# Altium PCB BQ24072-BREAKOUT.PcbDoc
Units mm, origin at the board's own origin, x right, y up, seen from the top; angles counter-clockwise.
Board outline 20.38 x 20.38 mm, 2 copper layers (Top Layer, Bottom Layer), stack 1.57 mm thick; 14 components, 17 nets, 69 pads, 30 vias.
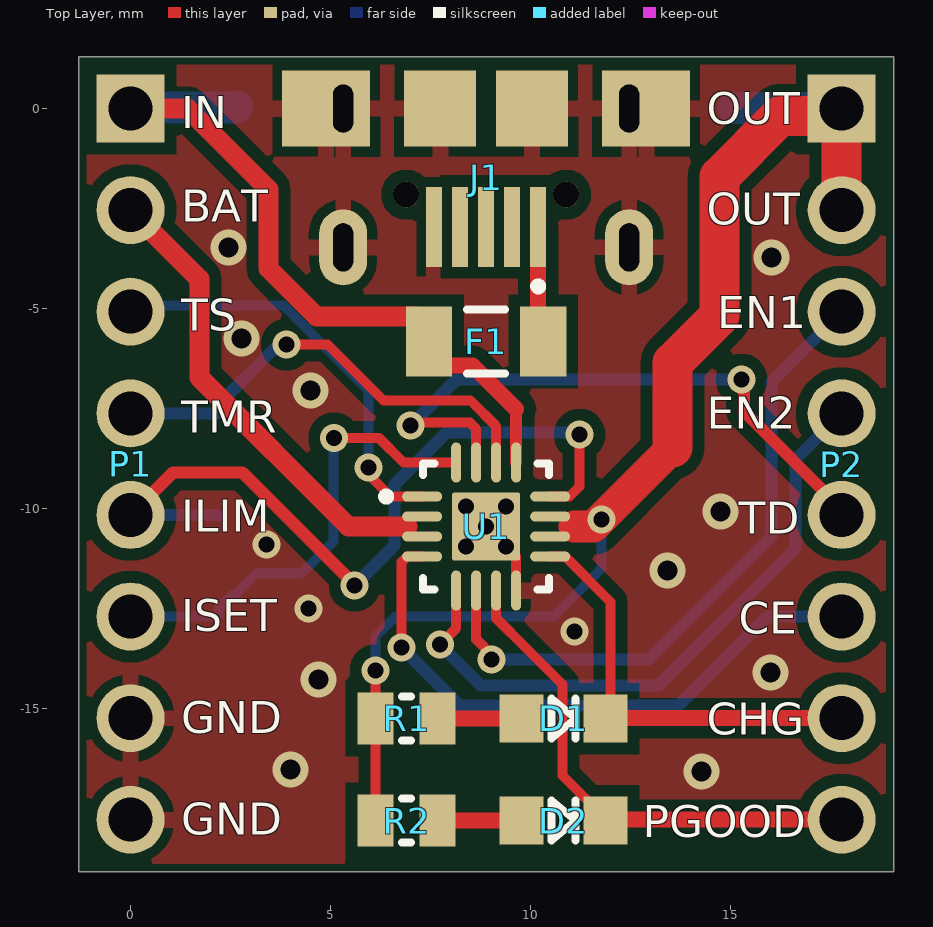
[diagram p0: Top Layer view]
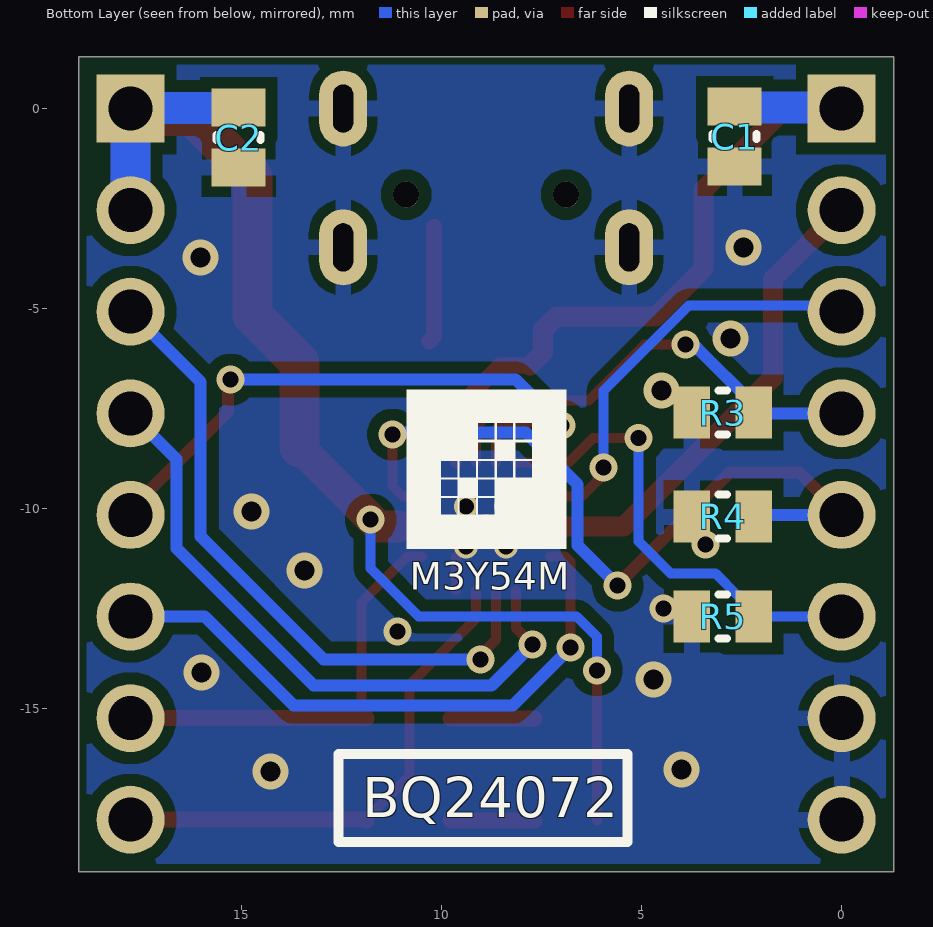
[diagram p1: Bottom Layer view, seen from below]
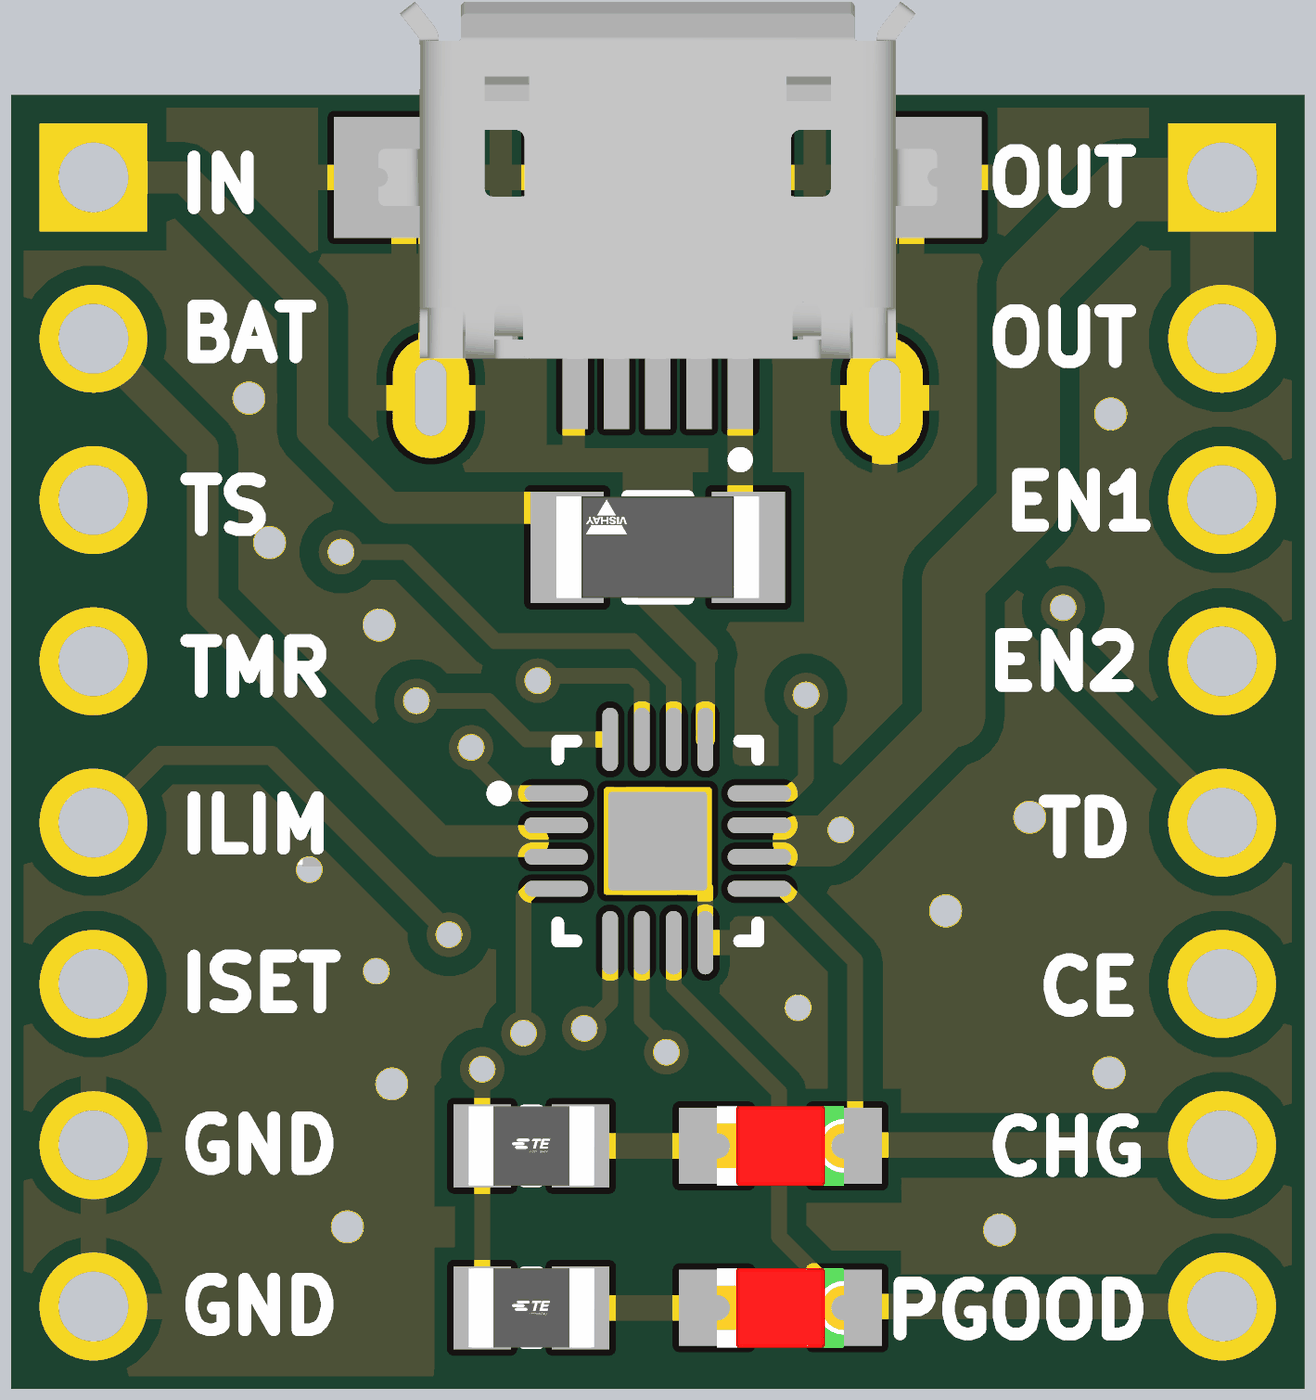
[diagram p2: 3D render of the assembled board from above, using the file's embedded part models]
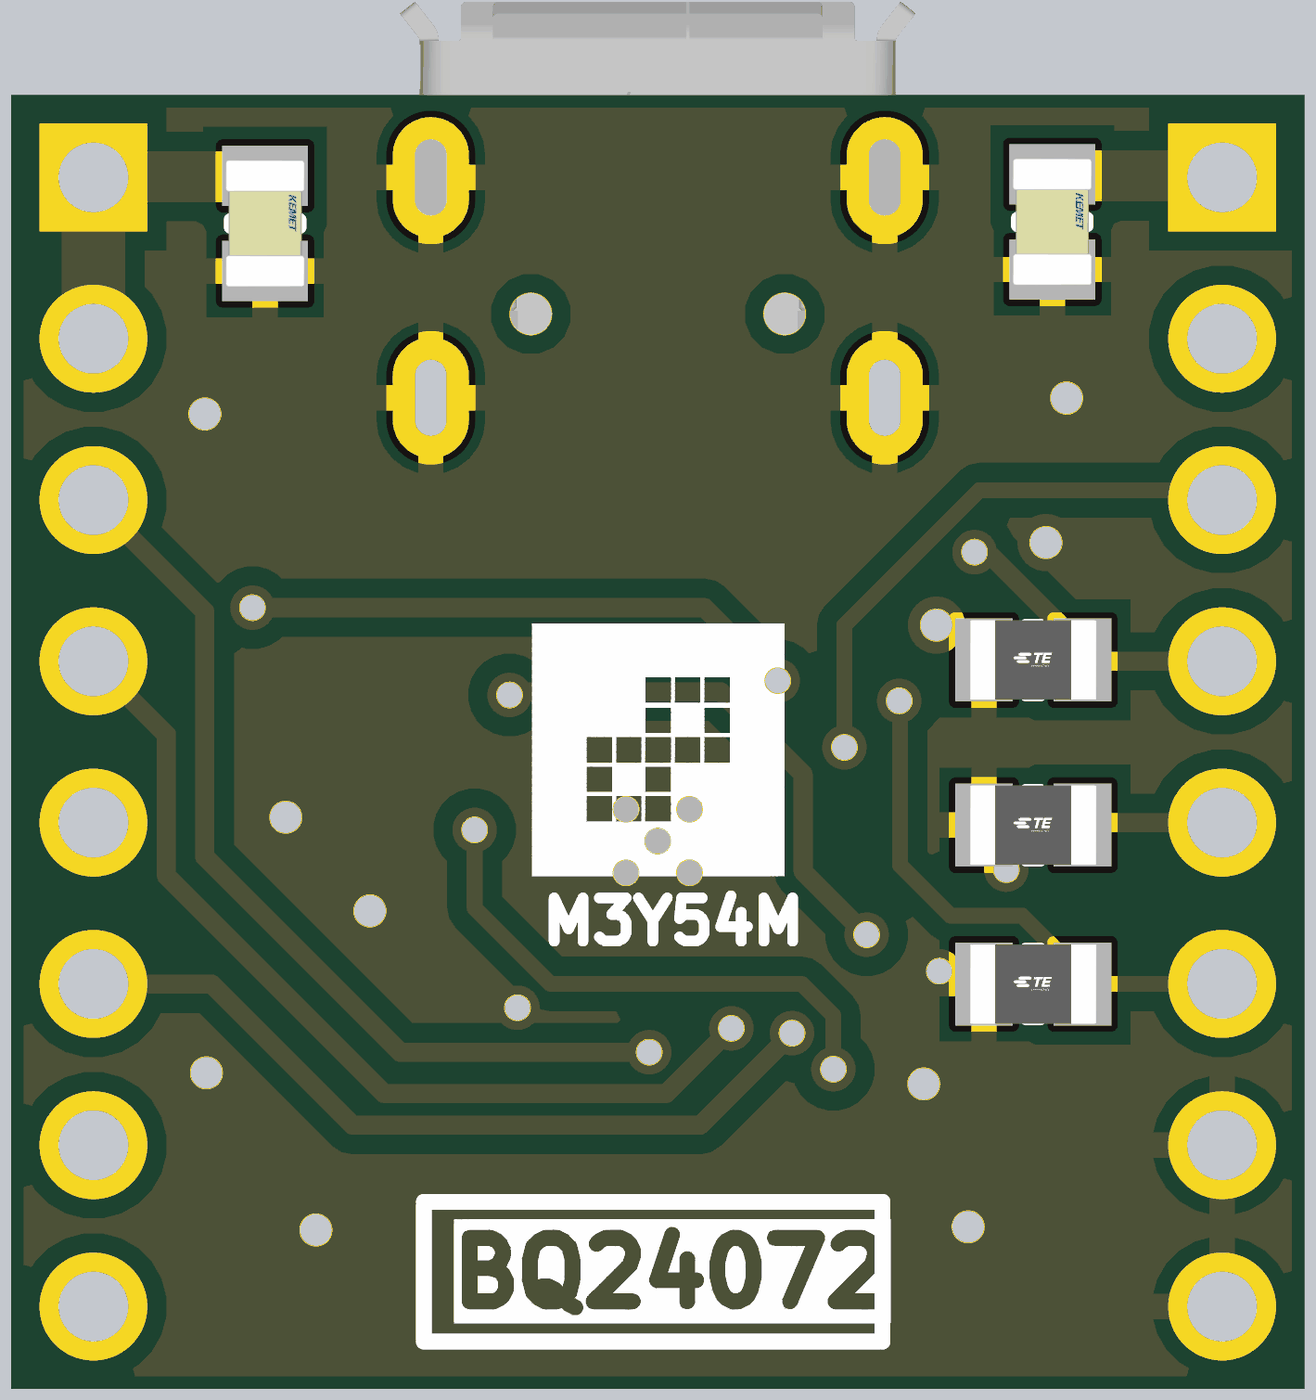
[diagram p3: 3D render of the assembled board from below, using the file's embedded part models]

## Layer stack, top to bottom
Top Solder: solder mask 0.015, Solder Resist, Dk 3.5
Top Layer: signal copper 0.035
Dielectric 1: dielectric 1.5, FR-4, Dk 4.2
Bottom Layer: signal copper 0.035
Bottom Solder: solder mask 0.015, Solder Resist, Dk 3.5

## Board outline
-1.3,-19.08 19.08,-19.08 19.08,1.3 -1.3,1.3

## Design rules (kind name [scope] priority, off if disabled: settings)
BoardOutlineClearance [All] p1: gap=0.2 ignorepadtopadclearanceinfootprint=FALSE
Clearance Clearance_Polygon_Fiducials [All vs InComponent('FID?')] p1: gap=1.3 ignorepadtopadclearanceinfootprint=FALSE
Clearance Clearance_Polygon [InPolygon] p2: gap=0.3 ignorepadtopadclearanceinfootprint=FALSE
Clearance [All] p3: gap=0.15 ignorepadtopadclearanceinfootprint=FALSE except(0: Arc-Hole Track-Hole SMDPad-Hole THPad-Hole Via-Hole Fill-Hole Poly-Hole Region-Hole Text-Hole)
HoleSize [All] p1: absolutevalues=TRUE maxlimit=3.5 minlimit=0.3 maxpercent=80.000 minpercent=20.000
MinimumSolderMaskSliver [All] p1: minsoldermaskwidth=0.15
PolygonConnect PolygonConnect_Via [IsVia] p1: connectstyle=Direct reliefconductorwidth=0.4 reliefentries=4 polygonreliefangle="90 Angle" airgapwidth=0.25
PolygonConnect [All] p2: connectstyle=Relief reliefconductorwidth=0.4 reliefentries=4 polygonreliefangle="90 Angle" airgapwidth=0.25
RoutingVias [All] p1: holewidth=0.4 width=0.7 viastyle="Through Hole" minholewidth=0.4 minwidth=0.6 maxholewidth=2 maxwidth=3
SilkToSilkClearance [All] p1: silktosilkclearance=0.15
SilkToSolderMaskClearance [IsPad] p1: minsilkscreentomaskgap=0.1 clearancetoexposedcopper=TRUE
SolderMaskExpansion SolderMaskExpansion_Via [IsVia] p1: expansion=0.102 istentingtop=TRUE soldermaskfromhole=TRUE
SolderMaskExpansion [All] p2: expansion=0.102 istentingtop=FALSE
Width [All] p1: maxlimit=2 minlimit=0.25 preferedwidth=0.3
26 further rules are at their usual default settings.

## Components (designator, comment, footprint, x,y, rotation, side; value= is the part's Value field where it differs from the comment)
C1 "C0805C104K5RAC7411" C0805 2.675,-0.7 r270 bottom value=1uF_50V
C2 "C0805C104K5RAC7411" C0805 15.075,-0.725 r270 bottom value=4.7uF_50V
D1 "RED" LED0805 10.825,-15.25 r180 top
D2 "BLUE" LED0805 10.825,-17.8 r180 top
F1 "NANOSMDC150F" R1206 8.89,-5.825 r180 top value=1.5A_6V_PTC
J1 "629105150921" CON-MICRO-USB-B-SMD-WITH-HOLDER 8.89,0 r180 top
P1 "CON-HDR-1X8" CON-HDR-1X8-2.54 0,0 r270 top
P2 "CON-HDR-1X8" CON-HDR-1X8-2.54 17.78,0 r270 top
R1 "CRG0805F10K" R0805 6.9,-15.25 r0 top value=2.2K
R2 "CRG0805F10K" R0805 6.9,-17.8 r0 top value=2.2K
R3 "CRG0805F10K" R0805 2.975,-7.6 r180 bottom value=46.4K
R4 "CRG0805F10K" R0805 2.975,-10.2 r180 bottom value=1.18K
R5 "CRG0805F10K" R0805 2.975,-12.7 r180 bottom value=1.13K
U1 "BQ24072TRGTT" VQFN-16 8.89,-10.45 r0 top

## Footprints (in the part's own frame and the unit in brackets; to place one, negate y for a bottom-side part, rotate by r counter-clockwise, add the part's x,y. Pads: shape width x height; smd on the part's side, far side on the other; paste and mask are expansions set on the pad)
C0805 [mm] "FP-C0805C-DN-MFG"
  rect 0.95x1.35 smd: 1(-0.75,0) 2(0.75,0)
  silkscreen extent -0.06,-0.55 0.06,0.55, body extent -1,-0.63 1,0.63, height 0.88
CON-HDR-1X8-2.54 [mm] "Connector; Header; 8 Position, 2.54 Pitch"
  rect 1.7x1.7 hole 1.1 paste-1000 mask+0: 1(0,0)
  round 1.7 hole 1.1 paste-1000 mask+0: 2(2.54,0) 3(5.08,0) 4(7.62,0) 5(10.16,0) 6(12.7,0) 7(15.24,0) 8(17.78,0)
CON-MICRO-USB-B-SMD-WITH-HOLDER [mm] "MICRO USB 5P female seat B type 7.2 four-pin board foot length 1.3 with column curling"
  rect 0.4x2 smd: 1(-1.3,2.96) 2(-0.65,2.96) 3(0,2.96) 4(0.65,2.96) 5(1.3,2.96)
  rect 2.2x1.9 smd: Shell(-4,0) Shell(4,0)
  oval 1.2x1.9 hole 0.5 slot 1.2 at 90 deg: Shell(-3.575,3.47) Shell(-3.575,0) Shell(3.575,3.47) Shell(3.575,0)
  rect 1.8x1.9 smd: Shell(-1.15,0) Shell(1.15,0)
  round 0.65 hole 0.65 paste+0 mask+0: ""(-2,2.15) ""(2,2.15)
  silkscreen extent -1.4,4.35 -1.2,4.54, body extent -4.4,-2.77 4.4,2.86, height 2.79
LED0805 [mm]
  rect 1.1x1.2 smd: 1(1.05,0) 2(-1.05,0)
  silkscreen extent -0.3,-0.5 0.3,0.5, body extent -1.7,-0.77 1.7,0.77, height 0.25
R0805 [mm] "FP-CRG0805-IPC_C"
  rect 0.906x1.307 smd: 1(-0.776,0) 2(0.776,0)
  silkscreen extent -0.11,-0.55 0.11,0.55, body extent -1.33,-0.8 1.33,0.8, height 0.25
R1206 [mm] "FP-CRCW1206-e3-IPC_B"
  rect 1.156x1.758 smd: 1(-1.426,0) 2(1.426,0)
  silkscreen extent -0.47,-0.8 0.47,0.8, body extent -2.25,-1.13 2.25,1.13, height 0.25
VQFN-16 [mm] "QFN, 16-Leads, Body 3x3mm, Pitch 0.5mm, Thermal Pad 1.65x1.65mm"
  oval 1x0.25 smd: 1(-1.6,0.75) 2(-1.6,0.25) 3(-1.6,-0.25) 4(-1.6,-0.75) 9(1.6,-0.75) 10(1.6,-0.25) 11(1.6,0.25) 12(1.6,0.75)
  oval 0.25x1 smd: 5(-0.75,-1.6) 6(-0.25,-1.6) 7(0.25,-1.6) 8(0.75,-1.6) 13(0.75,1.6) 14(0.25,1.6) 15(-0.25,1.6) 16(-0.75,1.6)
  rrect6% 1.55x1.55 on Top Paste: 17(0,0)
  rrect6% 1.7x1.7 smd paste-0.85: 17(0,0)
  silkscreen extent -2.6,-1.57 1.57,1.58, body extent -1.5,-1.5 1.5,1.5, height 1

## Part data
C1 C2: library part CAPACITOR, "C0805 0.10 μF X7R 30ppm/°C 10.00% 50 V", Capacitance=100nF, Manufacturer=KEMET, Package=C0805C-DN, Temperature="-55°C to +125°C", Temperature Characteristic=X7R, Temperature Coefficient=30ppm/°C, Temperature Range High=+125°C, Temperature Range Low=-55°C, Tolerance=0.1, Voltage Rating="50 V", Automotive=No, Category=Cap, ComponentLink2Description=Datasheet, ComponentLink2URL=https://content.kemet.com/datasheets/KEM_C1003_C0G_SMD.pdf, Device Class L1="Passive Components", Device Class L2=Capacitors, Device Class L3="Ceramic Capacitors", Height=0.88mm, Ipc Land Pattern Name=CAPC200125X78, Lead Free=Yes, Manufacturer Part Number=C0805C104K5RAC7411, Material=Ceramic, Octopart=https://octopart.com/c0805c104k5rac7411-kemet-18508045, RoHS=TRUE
D1 D2: library part LED, "Typical LED"
F1: library part FUSE-PTC, "FUSE PPTC 1.5A (1206) 6V RESETTABLE"
J1: library part CON-MICRO-USB-AB-RCPT-SMD, "Micro USB 2.0 Type AB Receptacle WR-COM, Horizontal, SMT", Contact Resistance=30mOhm, Manufacturer="Wurth Elektronik", Operating Temperature=-40to85degC, Rated Current=1.8A, Working Voltage=30VAC, Connector Type=MicroUSB2.0TypeAB, Datasheet URL=https://katalog.we-online.de/em/datasheet/629105150921.pdf, Gender=Receptacle, Manufacturer URL=http://www.we-online.de, Mounting Technology=SMT, Orientation=Horizontal, Package Reference=629105150921, Packaging=TapeandReel, Part Number=629105150921, Publisher=WurthElektronik
P1 P2: "Pin Header, 8-Pin", LatestRevisionDate=17-Jul-2002, LatestRevisionNote="Re-released for DXP Platform.", Publisher="Altium Limited"
R1 R2 R3 R4 R5: library part RESISTOR, "RES SMD 10K OHM 1% 1/8W 0805", Case/Package=0805, Max Operating Temperature=125°C, Min Operating Temperature=-55°C, Number of Resistors=1, Power Rating=125mW, Resistor Type="Thick Film", Temperature Coefficient=100ppm/°C, Tolerance=1%, Voltage Rating=150V, Depth=1.25mm, ELV=Compliant, Height=0.55mm, Length=2mm, Mount="Surface Mount", Number of Terminations=2, Packaging="Tape and Reel", Radiation Hardening=No, RoHS Compliant=Yes, Series="CRG Series", Technology="THICK FILM", Termination=Solder
U1: library part BQ24072, "1.5 A USB-Friendly Li-Ion Battery Charger and Power-Path Management IC, 4.3 V, -40 to 85 degC, 16-pin QFN (RGT), Green (RoHS & no Sb/Br)", Manufacturer="Texas Instruments", Over Voltage Protection=N, Code_JEDEC=MO-220, ComponentLink1Description=Datasheet, ComponentLink1URL=http://www.ti.com/general/docs/lit/getliterature.tsp?genericPartNumber=BQ24072T&fileType=pdf, DatasheetVersion=SLUS937A, Eco-Plan="Green (RoHS & no Sb/Br)", Lead Acid=N, Li-Ion=Y, Li-Polymer=Y, Mounting Technology="Surface Mount", NiCd=N, NiMH=N, PackageDescription="16-Pin Plastic Quad Flat No-Lead, 3 x 3 mm Body, 0.5 mm Pitch, 1.7 x 1.7 mm Exposed Pad", PackageReference=RGT0016C, PackageVersion="revH, Oct-2011", PartNumber=BQ24072TRGTT, SubFamily="Battery Charge Management", Vin(Min)(V)=4.3

## Via types
v1: diameter 0.7, hole 0.4, Top Layer to Bottom Layer, tented both sides, 15 vias
v2: diameter 0.9, hole 0.5, Top Layer to Bottom Layer, tented both sides, 10 vias
v3: diameter 0.6, hole 0.4, Top Layer to Bottom Layer, tented both sides, 5 vias

## Nets (pads, with @x,y where several pads share a name; then routed paths per layer and width w, separated by ;. In a path a pad name is that pad's centre, name@x,y a point inside that pad or via, vN(x,y) a via of type N, cw(c..) or ccw(c..) an arc to the next point about the centre after c; other vN are vias at no path point)
BAT: P1.2 U1.2 U1.3 | length 11.6
  Top Layer w0.5: P1.2 1.72,-4.26 1.72,-6.72 5.45,-10.45 6.925,-10.45
CE: P2.6 U1.4 | length 15.2
  Top Layer w0.25: v1(6.775,-13.475) 6.775,-11.34 6.915,-11.2 U1.4
  Bottom Layer w0.3: v1(6.775,-13.475) 8.225,-14.925 13.7,-14.925 15.925,-12.7 P2.6
CHG: D1.2 P2.7 U1.9 | length 10.7
  Top Layer w0.25: U1.9 10.865,-11.2 12,-12.335 D1.2@12,-15.125
  Top Layer w0.4: D1.2 11.885,-15.24 P2.7
EN1: P2.3 U1.6 | length 16.5
  Top Layer w0.25: U1.6 8.64,-13.268 9.025,-13.653 v1(9.025,-13.775)
  Bottom Layer w0.3: v1(9.025,-13.775) 12.95,-13.775 16.025,-10.7 16.025,-6.835 P2.3
EN2: P2.4 U1.5 | length 16.1
  Top Layer w0.25: v1(7.731,-13.399) 8.14,-12.99 U1.5
  Bottom Layer w0.3: v1(7.731,-13.399) 8.756,-14.425 13.2,-14.425 16.63,-10.995 16.63,-8.77 P2.4
GND: C1.2 C2.2 J1.5 J1.Shell P1.7 P1.8 R3.1 R4.1 R5.1 U1.8 U1.17@8.89,-10.45 | length 1.2
  Top Layer w0.25: v3(9.39,-10.95) 9.64,-11.2 U1.8
  other v1: 11.1,-13.075 4.454,-12.5 3.4,-10.9
  other v2: 14.275,-16.575 4,-16.525 4.7,-14.275 16,-14.1 13.425,-11.55 14.75,-10.075 4.5,-7.05 2.775,-5.75 16.025,-3.725 2.45,-3.475
  other v3: 8.39,-10.95 8.89,-10.45 8.39,-9.95 9.39,-9.95
ILIM: P1.5 R4.2 U1.12 | length 19.7
  Top Layer w0.25: U1.12 10.975,-9.7 11.225,-9.45 v1(11.225,-8.15)
  Top Layer w0.3: P1.5 1.06,-9.1 2.8,-9.1 5.6,-11.9 v1(5.6,-11.925)
  Bottom Layer w0.25: R4.2@2.159,-10.16 R4.2
  Bottom Layer w0.3: P1.5 R4.2@2.159,-10.16 ; v1(5.6,-11.925) 6.6,-10.925 6.6,-9.4 7.9,-8.1 11.175,-8.1 v1(11.225,-8.15)
IN: C1.1 F1.2 P1.1 U1.13 | length 18.3
  Top Layer w0.3: U1.13 9.64,-7.515
  Top Layer w0.4: F1.2@7.792,-6.425 8.55,-6.425 9.64,-7.515
  Top Layer w0.5: P1.1 1.425,0 3.45,-2.025 3.45,-4 4.65,-5.2 7.136,-5.2 7.464,-5.528 7.464,-6.097 F1.2@7.792,-6.425
  Bottom Layer w0.8: P1.1 0.025,0.025 2.65,0.025 C1.1
ISET: P1.6 R5.2 U1.16 | length 11.9
  Top Layer w0.25: v1(5.087,-8.242) 6.217,-8.242 6.825,-8.85 U1.16
  Bottom Layer w0.25: P1.6 R5.2 2.199,-12.499 2.527,-12.171 2.604,-12.171 3.15,-11.625 4.275,-11.625 5.075,-10.825 5.075,-8.254 v1(5.087,-8.242)
NetD1_1: D1.1 R1.2 | length 2.1
  Top Layer w0.4: R1.2 D1.1
NetD2_1: D2.1 R2.2 | length 2.1
  Top Layer w0.4: R2.2 D2.1
NetF1_1: F1.1 J1.1 | length 2.9
  Top Layer w0.4: J1.1 10.19,-5.699 F1.1
OUT: C2.1 P2.1 P2.2 R1.1 R2.1 U1.10 U1.11 | length 34.3
  Top Layer w0.25: R2.1 R1.1 v1(6.124,-14.043)
  Top Layer w0.8: 11.097,-10.45 11.575,-10.45 13.55,-8.475
  Top Layer w1: 13.55,-8.475 13.55,-6.35 14.725,-5.175 14.725,-1.7 16.235,-0.19 17.59,-0.19 P2.1 P2.2
  Bottom Layer w0.25: v1(6.124,-14.043) 6.124,-13.201 6.625,-12.7 10.575,-12.7 11.775,-11.5 v1(11.775,-10.275)
  Bottom Layer w0.8: C2.1 15.088,0.012 17.768,0.012 P2.1
  Bottom Layer w1: P2.2 P2.1
PGOOD: D2.2 P2.8 U1.7 | length 12.8
  Top Layer w0.25: U1.7 9.14,-12.74 9.9,-13.5 10.8,-14.4 10.8,-16.675 11.875,-17.75 D2.2
  Top Layer w0.4: D2.2 11.895,-17.78 P2.8
TD: P2.5 U1.15 | length 15.8
  Top Layer w0.25: v1(7,-7.925) 7.075,-7.85 8.481,-7.85 8.64,-8.009 U1.15
  Top Layer w0.3: v1(15.275,-6.775) 15.342,-6.842 15.342,-7.575 17.78,-10.013 P2.5
  Bottom Layer w0.3: v1(7,-7.925) 8.15,-6.775 v1(15.275,-6.775)
TMR: P1.4 R3.2 U1.14 | length 11.7
  Top Layer w0.25: v1(3.9,-5.9) 4.925,-5.9 6.325,-7.3 8.496,-7.3 9.14,-7.944 U1.14
  Bottom Layer w0.3: P1.4 2.179,-7.62 R3.2 2.199,-7.399 3.622,-5.977 3.823,-5.977 v1(3.9,-5.9)
TS: P1.3 U1.1 | length 10.6
  Top Layer w0.25: v1(5.95,-8.975) 6.036,-9.061 6.036,-9.236 6.5,-9.7 U1.1
  Bottom Layer w0.25: P1.3 0.155,-4.925 3.825,-4.925 5.95,-7.05 v1(5.95,-8.975)
pads on no net: J1. J1.2 J1.3 J1.4 U1.17@8.89,-10.45

## Polygon pours and split planes (outlines as drawn)
GND on Top Layer "GND_L01_P000" (solid, remove dead copper, pour order 0): -1.3,-19.08 19.08,-19.08 19.08,1.3 -1.3,1.3
GND on Bottom Layer "GND_L02_P001" (solid, remove dead copper, pour order 1): -1.3,-19.08 19.08,-19.08 19.08,1.3 -1.3,1.3

## Silkscreen, mask and mechanical layers (free items; w line width, h text height)
Top Overlay:
  text "OUT" at 14.407,-0.388 h0.8
  text "IN" at 1.263,-0.488 h0.8
  text "BAT" at 1.263,-2.835 h0.8
  text "OUT" at 14.407,-2.91 h0.8
  text "EN1" at 14.674,-5.488 h0.8
  text "TS" at 1.263,-5.557 h0.8
  text "EN2" at 14.407,-8.01 h0.8
  text "TMR" at 1.263,-8.103 h0.8
  text "ILIM" at 1.263,-10.575 h0.8
  text "TD" at 15.207,-10.632 h0.8
  text "ISET" at 1.263,-13.071 h0.8
  text "CE" at 15.207,-13.128 h0.8
  text "GND" at 1.263,-15.617 h0.8
  text "CHG" at 14.407,-15.65 h0.8
  text "GND" at 1.263,-18.157 h0.8
  text "PGOOD" at 12.808,-18.221 h0.8
Bottom Overlay:
  drawing of 5 lines, arcs and shapes, not listed
  text "M3Y54M" at 10.802,-12.035 h0.68
  text "BQ24072" at 11.992,-17.712 h1
Mechanical 1:
  the board outline again, w0.1